# Altium PCB SmallBoard.PcbDoc
Units mm, origin at the board's own origin, x right, y up, seen from the top; angles counter-clockwise.
Board outline 52 x 52 mm, 2 copper layers (Top Layer, Bottom Layer); 27 components, 24 nets, 102 pads, 12 vias.
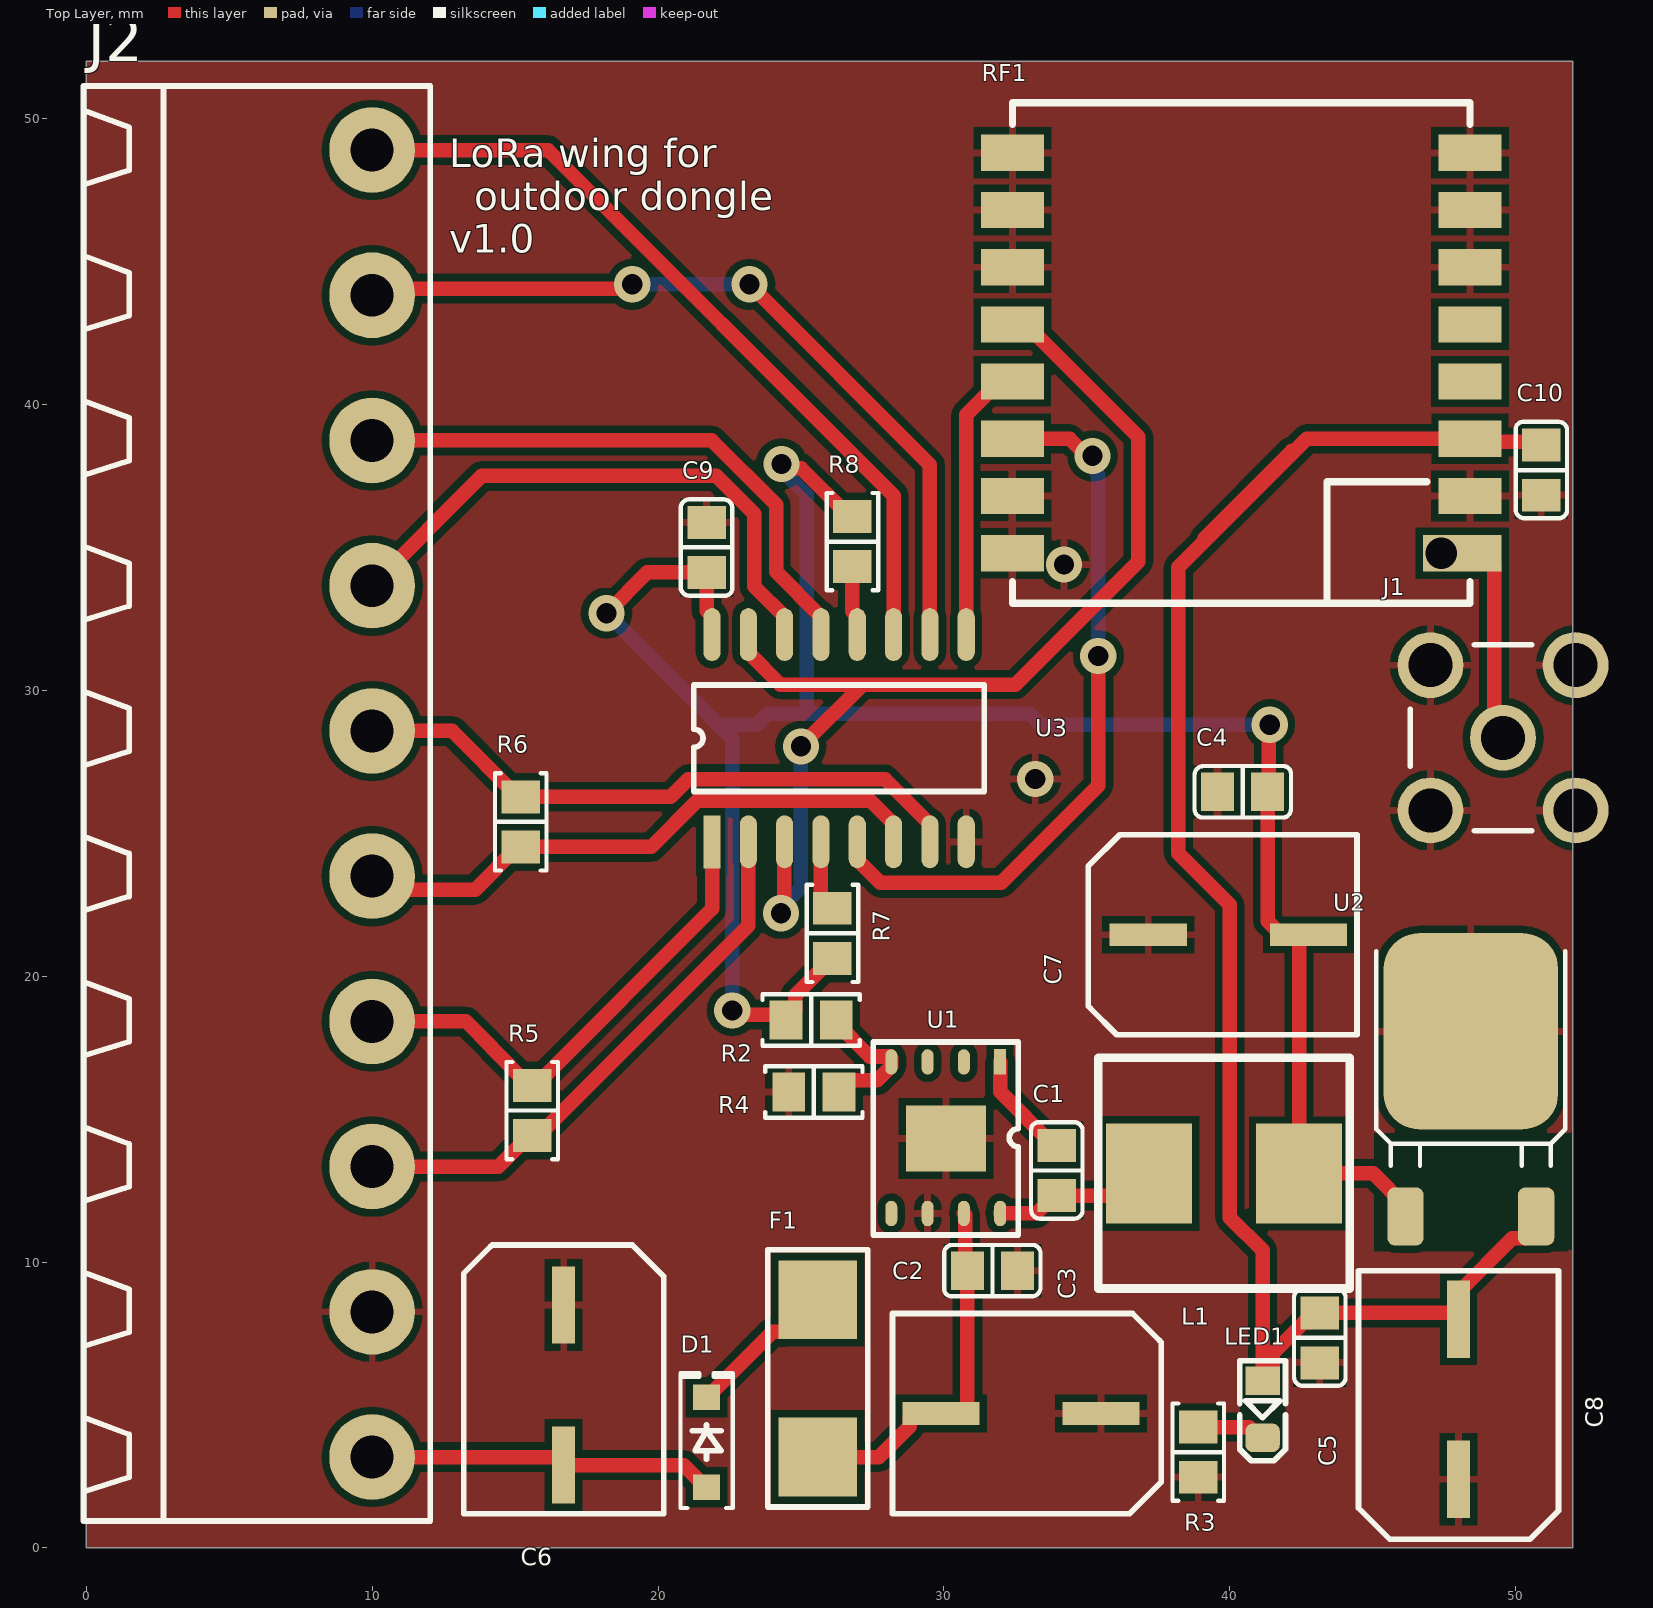
[diagram p0: Top Layer view]
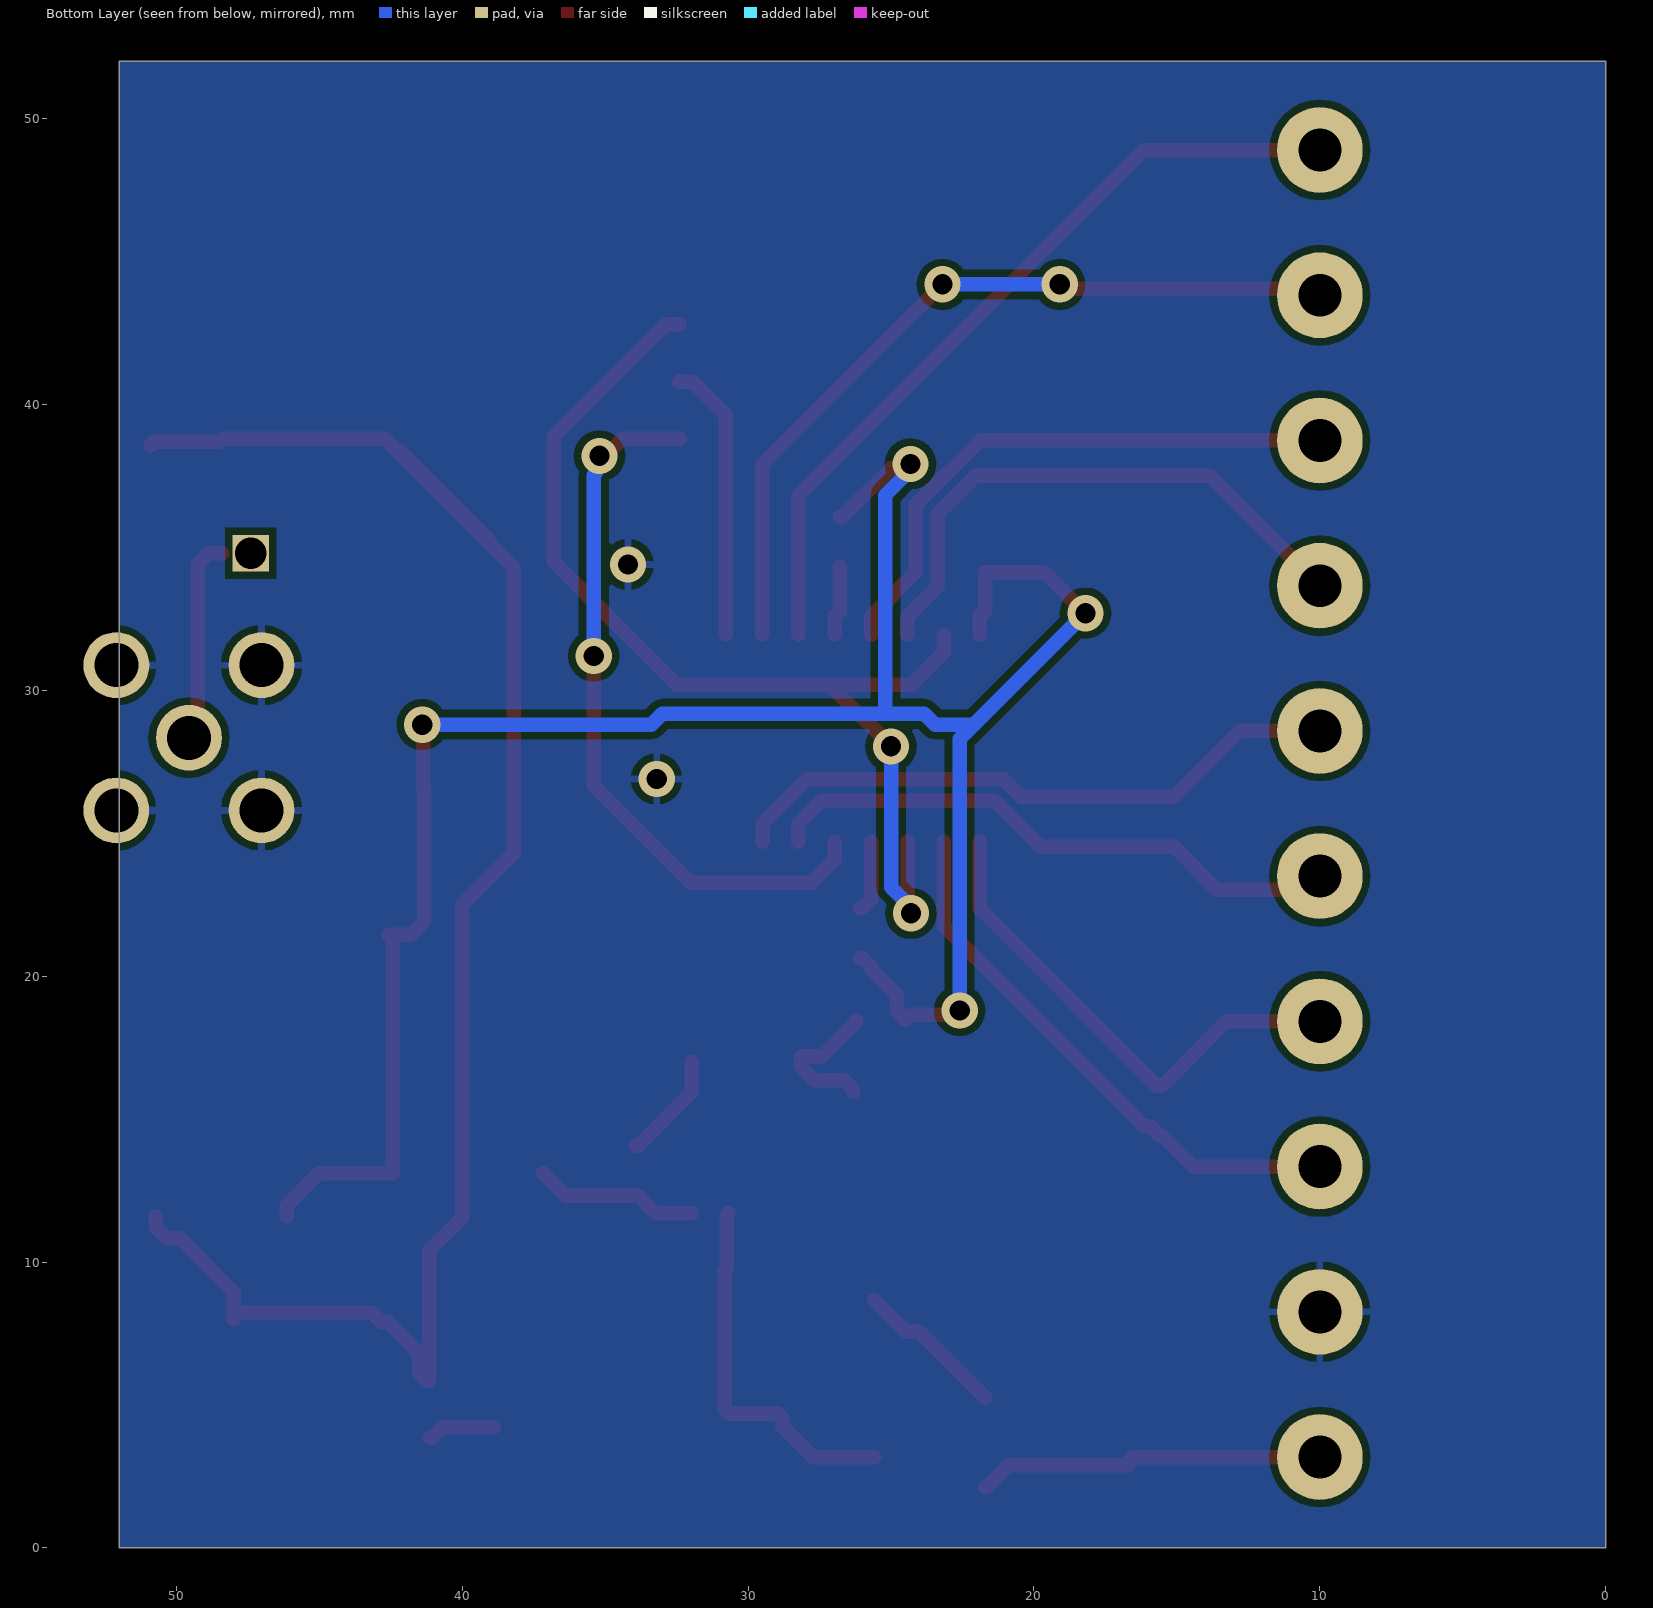
[diagram p1: Bottom Layer view, seen from below]
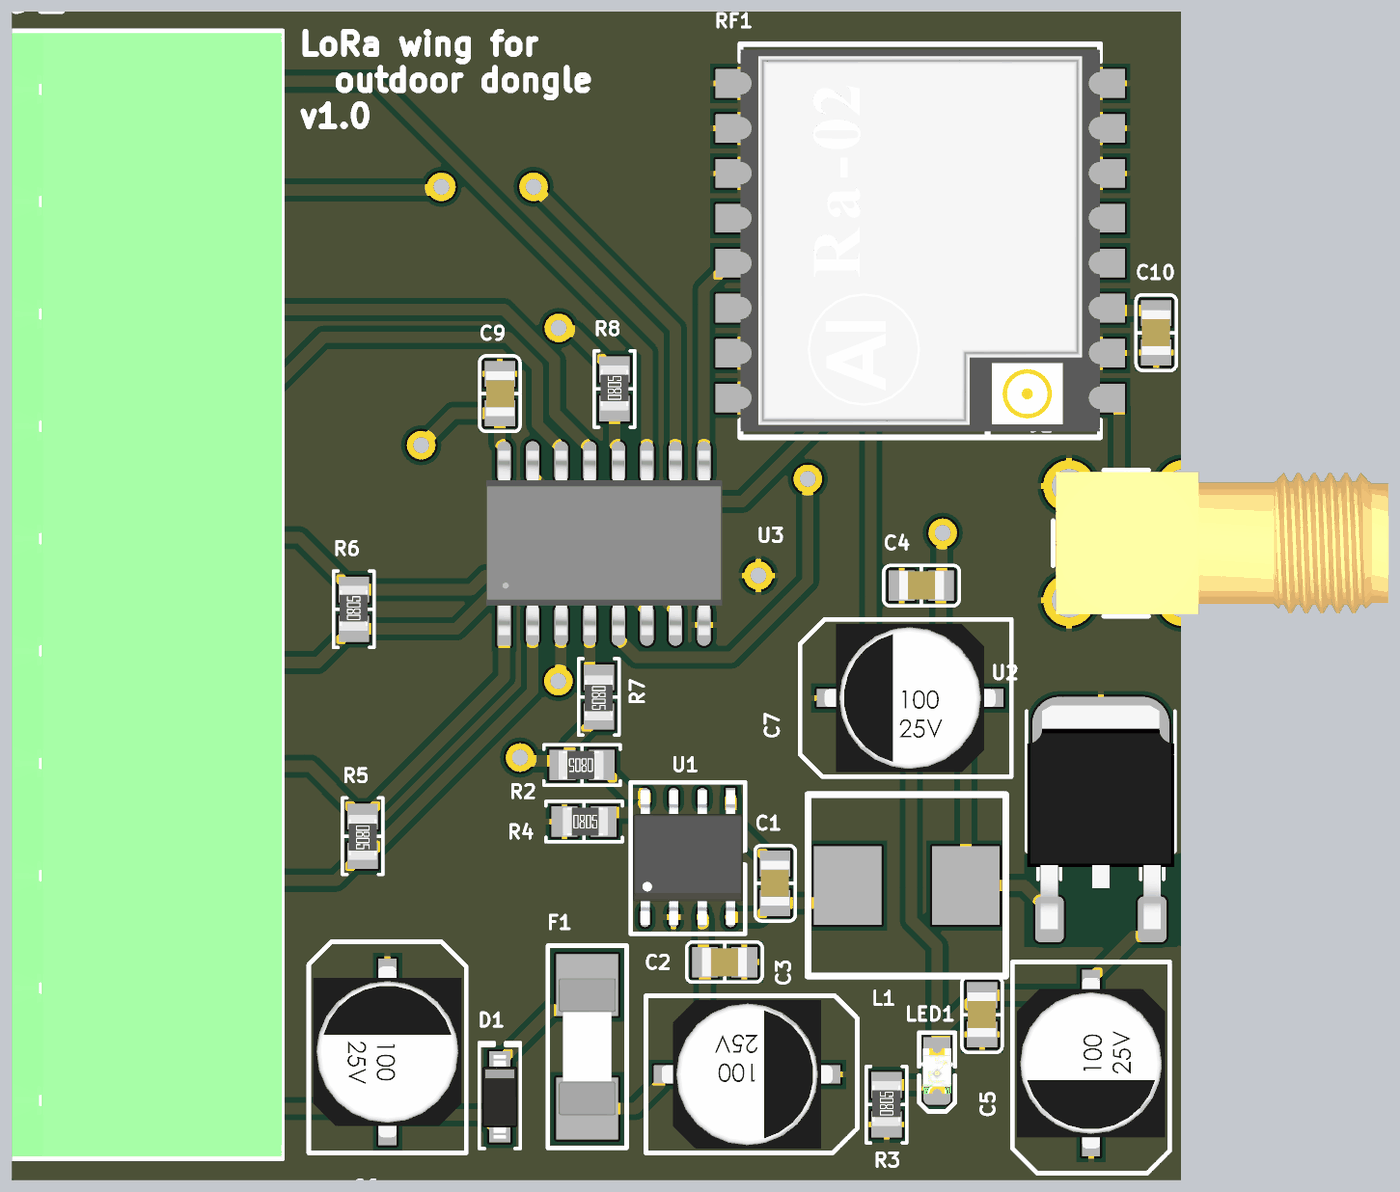
[diagram p2: 3D render of the assembled board from above, using the file's embedded part models]

## Layer stack, top to bottom
Top Solder: solder mask 0.0102, Solder Resist, Dk 3.5
Top Layer: signal copper 0.0356
Dielectric 1: dielectric 0.32, FR-4, Dk 4.8
Bottom Layer: signal copper 0.0356
Bottom Solder: solder mask 0.0102, Solder Resist, Dk 3.5

## Board outline
0,0 0,52 52,52 52,0

## Design rules (kind name [scope] priority, off if disabled: settings)
Clearance [All] p1: gap=0.254 ignorepadtopadclearanceinfootprint=FALSE except(0: Arc-Hole Track-Hole SMDPad-Hole THPad-Hole Via-Hole Fill-Hole Poly-Hole Region-Hole Text-Hole)
PolygonConnect [All] p1: connectstyle=Relief reliefconductorwidth=0.254 reliefentries=4 polygonreliefangle="90 Angle" airgapwidth=0.254
RoutingVias [All] p1: holewidth=0.711 width=1.27 viastyle="Through Hole" minholewidth=0.711 minwidth=1.27 maxholewidth=0.711 maxwidth=1.27
SilkToSilkClearance [All] p1: silktosilkclearance=0.1
SilkToSolderMaskClearance [IsPad] p1: minsilkscreentomaskgap=0 clearancetoexposedcopper=TRUE
SolderMaskExpansion [All] p1: expansion=0.102 istentingtop=FALSE
Width [All] p1: maxlimit=2 minlimit=0.254 preferedwidth=0.254
28 further rules are at their usual default settings.

## Components (designator, comment, footprint, x,y, rotation, side; value= is the part's Value field where it differs from the comment)
C1 "10nF" "CAP 0805_2012" 33.95,13.2 r90 top value=100nF
C2 "100nF" "CAP 0805_2012" 31.7,9.7 r180 top
C3 "10uF" CAP_6.3x7.7 32.7,4.7 r0 top
C4 "100nF" "CAP 0805_2012" 40.45,26.45 r0 top
C5 "100nF" "CAP 0805_2012" 43.15,7.35 r90 top
C6 "100uF" CAP_6.3x7.7 16.7,5.7 r90 top
C7 "22uF" CAP_6.3x7.7 39.95,21.45 r180 top
C8 "22uF" CAP_6.3x7.7 48,5.2 r270 top
C9 "100nF" "CAP 0805_2012" 21.7,35 r270 top
C10 "100nF" "CAP 0805_2012" 50.9,37.7 r90 top
D1 "1N5819" SOD-123 21.7,3.7 r90 top
F1 "Fuse 2402" 2402 25.7,5.7 r90 top
J1 "SMA" "MOLEX SD-73100-0114" 49.56,28.34 r0 top
J2 "Phoenix MSTB 10Pin" "PHOENIX MSTB_10" 10,26.04 r90 top
L1 "TMPC0603H Power Choke coil" 6.3coil 39.7,12.95 r0 top
LED1 "LED SMD 0805 GREEN" LED_0805_GREEN 41.15,4.85 r270 top
R2 "150k 1%" "RES 0805_2012" 25.358,18.467 r180 top value=1K
R3 "1K" "RES 0805_2012" 38.9,3.35 r90 top
R4 "47k 1%" "RES 0805_2012" 25.45,15.95 r0 top value=1K
R5 "120" "RES 0805_2012" 15.6,15.3 r270 top value=1K
R6 "120" "RES 0805_2012" 15.2,25.4 r90 top value=1K
R7 "1k" "RES 0805_2012" 26.1,21.5 r270 top value=1K
R8 "1k" "RES 0805_2012" 26.8,35.2 r90 top value=1K
RF1 "Lora-Ra-01" LORA-RA-01 48.4,33.3 r90 top
U1 "TPS5450DDAR" PDSO-G8 31.97,16.9 r270 top
U2 "LF33" TO-252 48.4,14.2 r0 top
U3 "SN65C1168NSR" SOP16 21.89,24.7 r90 top

## Footprints (in the part's own frame and the unit in brackets; to place one, negate y for a bottom-side part, rotate by r counter-clockwise, add the part's x,y. Pads: shape width x height; smd on the part's side, far side on the other; paste and mask are expansions set on the pad)
6.3coil [mm]
  rect 3x3.5 smd: 1(-2.525,0.15) 2(2.725,0.15)
  silkscreen extent -4.3,-3.88 4.5,4.2, body extent -3.77,-3.35 3.97,3.65, height 5
2402 [mm]
  rect 2.75x2.75 smd: 1(2.98,0.112) 2(-2.52,0.112)
  silkscreen extent -4.27,-1.64 4.73,1.86, body extent -2.82,-1.16 3.28,1.38, height 2.54
"CAP 0805_2012" [mm] "Chip Capacitor, 2-Leads, Body 2.00x1.20mm, IPC Medium Density"
  rect 1.15x1.35 smd: 1(-0.875,0) 2(0.875,0)
  silkscreen extent -1.68,-0.9 1.69,0.9, body extent -0.99,-0.62 1.01,0.65, height 1.26
CAP_6.3x7.7 [mm]
  rect 2.7x0.8 smd: +(-2.8,0) -(2.8,0)
  silkscreen extent -4.5,-3.5 4.9,3.5, body extent -3.8,-3.3 3.8,3.3, height 8
LED_0805_GREEN [mm] "LED SMD 0805, GREEN"
  rect 1x1.2 smd mask+0.075: 1(-1,0)
  rrect50% 1x1.2 smd mask+0.075: 2(1,0)
  Top Layer pour cut-out: -0.5,0.8 0.5,0.8 0.5,-0.8 -0.5,-0.8
  silkscreen extent -1.7,-0.8 1.8,0.8, body extent -1,-0.63 1,0.63, height 0.7
LORA-RA-01 [mm]
  rect 1.27x1.27 hole 1.1: 1(1.5,1)
  rect 1.27x2.2 smd: 1(1.5,0) 2(3.5,0) 3(5.5,0) 4(7.5,0) 5(9.5,0) 6(11.5,0) 7(13.5,0) 8(15.5,0) 9(15.5,16) 10(13.5,16) 11(11.5,16) 12(9.5,16) 13(7.5,16) 14(5.5,16) 15(3.5,16) 16(1.5,16)
  silkscreen extent -0.25,0 17.25,16, body extent 0.01,0 17.01,16, height 3.2
"MOLEX SD-73100-0114" [mm]
  round 2.302 hole 1.54: G(-2.54,-2.54) G(2.54,-2.54)
  round 2.304 hole 1.54: G(-2.54,2.54) G(2.54,2.54) S(0,0)
  silkscreen extent -3.25,-3.25 1,3.25, body extent -3.12,-3.17 11.68,3.17, height 9.67
PDSO-G8 [mm]
  rect 0.89x0.42 smd: 1(-0.1,0)
  oval 0.89x0.42 smd: 2(-0.1,-1.27) 3(-0.1,-2.54) 4(-0.1,-3.81) 5(5.2,-3.81) 6(5.2,-2.54) 7(5.2,-1.27) 8(5.2,0)
  rect 2.3x2.8 smd: 9(2.575,-1.9)
  silkscreen extent -0.8,-4.44 5.95,0.64, body extent -0.45,-4.35 5.55,0.55, height 1.7
"PHOENIX MSTB_10" [mm] "PHOENIX MSTB 2, 5-G, 5.08mm pitch"
  round 3 hole 1.5: 1(-22.86,0) 2(-17.78,0) 3(-12.7,0) 4(-7.62,0) 5(-2.54,0) 6(2.54,0) 7(7.62,0) 8(12.7,0) 9(17.78,0) 10(22.86,0)
  silkscreen extent -25.1,-2.03 25.1,10.1, body extent -25,-2 25,10, height 8.6
"RES 0805_2012" [mm] "Chip Resistor, 2-Leads, Body 2.00x1.25mm, IPC Medium Density"
  rect 1.15x1.35 smd: 1(-0.875,0) 2(0.875,0)
  silkscreen extent -1.7,-0.9 1.7,0.9, body extent -0.95,-0.62 1.05,0.63, height 0.6
SOD-123 [mm] "SOD, 2-Leads, Body 1.55x3.70mm, IPC Medium Density"
  rect 0.9x0.95 smd: 1(-1.575,0) 2(1.575,0)
  silkscreen extent -2.3,-0.92 2.41,0.92, body extent -1.86,-0.78 1.86,0.77, height 1.35
SOP16 [mm]
  rect 1.85x0.6 smd: 1(0,0)
  oval 1.85x0.6 smd: 2(0,-1.27) 3(0,-2.54) 4(0,-3.81) 5(0,-5.08) 6(0,-6.35) 7(0,-7.62) 8(0,-8.89) 9(7.25,-8.89) 10(7.25,-7.62) 11(7.25,-6.35) 12(7.25,-5.08) 13(7.25,-3.81) 14(7.25,-2.54) 15(7.25,-1.27) 16(7.25,0)
  silkscreen extent 1.76,-9.53 5.49,0.64, body extent -0.45,-9.69 7.75,0.8, height 2.01
TO-252 [mil]
  rrect40% 50x80 smd: 1(-88.75,-102.5) 3(91.25,-102.5)
  rrect40% 240x270 smd: 4(1.25,152.5)
  Top Layer pour cut-out: -132.5,12.5 137.5,12.5 137.5,-147.5 133.75,-151.25 -132.5,-151.25
  Top Layer pour cut-out: -192.5,-118.75
  silkscreen extent -129,-32 131,262, body extent -127,-119 130,272, height 91

## Part data
C1 C2 C4 C5 C9 C10: library part "Cap 0805", "SMT Capacitor"
C3 C6 C7 C8: library part "Cap Alu 6.3x7.7mm", "SMD Aluminum Capacitor 6.3x7.7mm"
D1: library part "1N5819 (SMD)", "Diode Schottky 40V 1A Surface Mount SOD-123  Speed Fast Recovery =< 500ns, > 200mA (Io)", PartNumber=1N5819HW-7-F
J1: library part "SMA-RA MOLEX SD-73100-0114 (THD)", PartNumber="MOLEX SD-73100-0114"
J2: "CONN, PHOENIX MSTB, 5-G, 5.08mm pitch", PartNumber="MSTB 2,5/10-G-5,08 - 1759091"
R2 R3 R4 R5 R6 R7 R8: library part "Res 0805", "SMT Resistor"
U1: "Buck Switching Regulator IC Positive Adjustable 1.221V 1 Output 5A 8-PowerSOIC (0.154, 3.90mm Width)", Case/Package=HSOP, Manufacturer="Texas Instruments", Max Input Voltage=36V, Max Operating Temperature=125°C, Max Output Current=5A, Max Output Voltage=31V, Min Input Voltage=5.5V, Min Operating Temperature=-40°C, Min Output Voltage=1.22V, Package Quantity=2500, Quiescent Current=3mA, Supplier Part Number 1=296-26997-1-ND, Switching Frequency=500kHz, Category="Voltage Regulators - Switching", ComponentLink1Description=https://datasheet.ciiva.com/15113/getdatasheetpartid-172659-15113657.pdf?src-supplier=Verical, ComponentLink1URL=https://datasheet.ciiva.com/15113/getdatasheetpartid-172659-15113657.pdf?src-supplier=Verical, ComponentLink2Description=https://datasheet.ciiva.com/2035/tps5450-2035367.pdf?src-supplier=Digi-Key, ComponentLink2URL=https://datasheet.ciiva.com/2035/tps5450-2035367.pdf?src-supplier=Digi-Key, ComponentLink3Description=https://datasheet.ciiva.com/2035/tps5450-2035366.pdf?src-supplier=Digi-Key, ComponentLink3URL=https://datasheet.ciiva.com/2035/tps5450-2035366.pdf?src-supplier=Digi-Key, ComponentLink4Description=https://datasheet.ciiva.com/2035/tps5450-2035368.pdf?src-supplier=Digi-Key, ComponentLink4URL=https://datasheet.ciiva.com/2035/tps5450-2035368.pdf?src-supplier=Digi-Key, ComponentLink5Description=https://datasheet.ciiva.com/14303/tps5450-14303689.pdf?src-supplier=Avnet, ComponentLink5URL=https://datasheet.ciiva.com/14303/tps5450-14303689.pdf?src-supplier=Avnet, ComponentLink6Description=https://datasheet.ciiva.com/3220/tps5450-3220230.pdf?src-supplier=Avnet, ComponentLink6URL=https://datasheet.ciiva.com/3220/tps5450-3220230.pdf?src-supplier=Avnet, Efficiency=90%, Height=1.55mm, Lead Free="Lead Free", Length=5mm, Manufacturer Part Number=TPS5450DDAR, Mount="Surface Mount", Number of Outputs=1, Number of Pins=8, Operating Supply Voltage=36V, Output Current=5A, Output Type=Adjustable, Output Voltage=31V, Packaging="Tape and Reel", Pricing 1="1=5.44000, 10=4.88400, 25=4.61720, 100=4.00170, 250=3.79648, 500=3.40658, 1000=3.09760 (USD)", Radiation Hardening=No, RoHS=Yes, RoHS Compliant=Yes, Series=SWIFT™, Stock 1=16111, Supplier 1=Digi-Key, Synchronous Rectifier=No, Weight=0.00249oz, Width=4mm
U2: library part "LF33 (SMD)", "500mA, Very Low Drop (0.45V) Voltage Regulator, 3.3V, 3-Pin DPAK, Tape and Reel", PartNumber=LF33CDT-TR, ComponentLink1Description="Manufacturer URL", ComponentLink1URL=http://www.st.com, ComponentLink2Description=Datasheet, ComponentLink2URL=http://www.st.com/internet/com/TECHNICAL_RESOURCES/TECHNICAL_LITERATURE/DATASHEET/CD00000546.pdf, DatasheetVersion=Nov-2010, PackageDescription="3-Pin Transistor Outline Package 2.28 mm Pitch, 9.7 mm Lead Span (DPAK)", PackageReference=TO-252, PackageVersion=2011
U3: "SN65C1168 Dual Differential Dri", Case/Package=SOP, Manufacturer="Texas Instruments", Max Operating Temperature=85°C, Max Supply Current=9mA, Max Supply Voltage=5.5V, Min Operating Temperature=-40°C, Min Supply Voltage=4.5V, Operating Supply Voltage=5V, Package Quantity=2000, Supplier Part Number 1=296-31716-6-ND, Category="Interface ICs", ComponentLink1Description=https://datasheet.ciiva.com/6636/sn65c1168-6636522.pdf?src-supplier=Digi-Key, ComponentLink1URL=https://datasheet.ciiva.com/6636/sn65c1168-6636522.pdf?src-supplier=Digi-Key, ComponentLink2Description=https://datasheet.ciiva.com/6636/sn65c1168-6636521.pdf?src-supplier=Digi-Key, ComponentLink2URL=https://datasheet.ciiva.com/6636/sn65c1168-6636521.pdf?src-supplier=Digi-Key, ComponentLink3Description=https://datasheet.ciiva.com/6636/sn65c1168-6636523.pdf?src-supplier=Digi-Key, ComponentLink3URL=https://datasheet.ciiva.com/6636/sn65c1168-6636523.pdf?src-supplier=Digi-Key, ComponentLink4Description=https://datasheet.ciiva.com/14426/slls159f-14426415.pdf?src-supplier=Avnet, ComponentLink4URL=https://datasheet.ciiva.com/14426/slls159f-14426415.pdf?src-supplier=Avnet, Contact Plating=Gold, Data Rate=10Mbps, ESD Protection=No, Lead Free="Lead Free", Logic Function=Transceiver,Receiver, Manufacturer Part Number=SN65C1168NSR, Nominal Supply Current=9mA, Number of Drivers=2, Number of Pins=16, Number of Receivers=2, Number of Transceivers=1, Number of Transmitters=2, Operating Supply Current=9mA, Packaging="Tape and Reel", Pricing 1="1=3.24000, 10=2.90600, 25=2.74760, 100=2.38120, 250=2.25908, 500=2.02706, 1000=1.72800 (USD)", RoHS=Yes, RoHS Compliant=Yes, Series=-, Simplex/Duplex="Full Duplex", Supplier 1=Digi-Key, Supply Current=9mA, Weight=0.007079oz

## Via types
v1: diameter 1.27, hole 0.711, Top Layer to Bottom Layer, 12 vias

## Nets (pads, with @x,y where several pads share a name; then routed paths per layer and width w, separated by ;. In a path a pad name is that pad's centre, name@x,y a point inside that pad or via, vN(x,y) a via of type N, cw(c..) or ccw(c..) an arc to the next point about the centre after c; other vN are vias at no path point)
1A: J2.7 U3.14 | length 20.2
  Top Layer w0.508: J2.7 13.84,37.5 22.043,37.5 23.372,36.172 23.372,33.633 24.43,32.575 U3.14
1B: J2.8 U3.13 | length 20.3
  Top Layer w0.508: J2.8 21.881,38.74 24.134,36.487 24.134,34.141 25.7,32.575 U3.13
1DE: R7.1 U3.4 | length 2.5
  Top Layer w0.508: U3.4 25.7,22.696 26.021,22.375 R7.1
1Y: J2.3 R5.2 U3.2 | length 19.6
  Top Layer w0.508: J2.3 14.415,13.34 15.5,14.425 R5.2 15.921,14.746 16.139,14.746 23.16,21.767 U3.2
1Z: J2.4 R5.1 U3.1 | length 17.7
  Top Layer w0.508: J2.4 13.282,18.42 14.2,17.502 14.2,17.475 15.5,16.175 R5.1 15.7,16.175 21.89,22.365 U3.1
2A: J2.9 U3.10 | length 28.2
  Top Layer w0.508: J2.9 10.234,44.054 18.954,44.054 v1(19.1,44.2) ; v1(23.2,44.2) 29.51,37.89 U3.10
  Bottom Layer w0.508: v1(19.1,44.2) v1(23.2,44.2)
2B: J2.10 U3.11 | length 28.1
  Top Layer w0.508: J2.10 16.152,48.9 28.24,36.812 U3.11
2DE: R8.1 U3.12 | length 2.4
  Top Layer w0.508: R8.1 26.8,32.77 26.97,32.6 U3.12
2Y: J2.5 R6.1 U3.6 | length 20.7
  Top Layer w0.508: J2.5 10.475,23.025 13.6,23.025 15.1,24.525 R6.1 19.772,24.525 21.38,26.133 27.432,26.133 28.24,25.325 U3.6
2Z: J2.6 R6.2 U3.7 | length 22
  Top Layer w0.508: J2.6 12.795,28.58 15.1,26.275 20.444,26.275 21.064,26.895 27.94,26.895 29.48,25.355 29.48,24.73 U3.7
3V3: C5.2 C8.+ C10.2 LED1.1 RF1.3 U2.3 | length 62
  Top Layer w0.508: 39.1,35.3 42.173,38.373 ; C8.+ C8.+@48,8.079 ; U2.3 50.718,11.215 50.337,10.834 49.884,10.834 48,8.95 C8.+@48,8.079 ; C10.2 50.788,38.687 48.512,38.687 RF1.3 42.7,38.8 38.2,34.3 38.2,24.3 40,22.5 40,11.557 41.15,10.407 LED1.1 41.25,5.85 41.496,6.096 41.496,6.789 42.611,7.904 42.829,7.904 C5.2 47.854,8.225 C8.+@48,8.079
+5: C4.2 C7.+ C9.2 L1.2 R2.2 R7.2 R8.2 U2.1 U3.16 | length 80.3
  Top Layer w0.508: v1(18.2,32.7) 19.625,34.125 C9.2 21.7,32.79 21.89,32.6 U3.16 ; v1(22.6,18.8) 22.746,18.654 24.296,18.654 R2.2 24.804,18.788 24.804,19.329 25.679,20.204 25.679,20.304 26,20.625 R7.2 ; v1(24.319,37.919) 24.465,37.773 25.002,37.773 26.7,36.075 R8.2 ; v1(41.4,28.8) 41.362,28.762 41.362,26.488 C4.2 41.325,21.925 41.8,21.45 42.571,21.45 42.425,21.304 L1.2 45.023,13.1 46.146,11.977 U2.1
  Bottom Layer w0.508: v1(18.2,32.7) 22.1,28.8 ; v1(22.6,18.8) 22.6,28.3 22.1,28.8 ; v1(24.319,37.919) 24.319,37.713 25.2,36.831 25.2,29.181 ; v1(41.4,28.8) 33.387,28.8 33.006,29.181 25.2,29.181 ; 22.1,28.8 23.46,28.8 23.841,29.181 25.2,29.181
+12: C2.2 C3.+ F1.2 U1.7 | length 13
  Top Layer w0.508: F1.2 27.725,3.18 28.804,4.259 28.804,4.554 28.95,4.7 C3.+ 30.679,4.7 30.825,4.846 C2.2 30.744,9.781 30.744,11.656 U1.7
+12_AFTER: C6.+ D1.1 J2.1 | length 12.2
  Top Layer w0.508: J2.1 16.554,3.18 16.7,3.034 C6.+ 20.9,2.9 21.675,2.125 D1.1
GND: C2.1 C3.- C4.1 C5.1 C6.- C7.- C8.- C9.1 C10.1 J1.G J2.2 R3.1 R4.1 RF1.2 RF1.6 RF1.7 RF1.8 RF1.9 RF1.10 RF1.11 RF1.15 RF1.16 U1.6 U1.9 U2.4 U3.8
  other v1: 33.2,26.9 34.2,34.4
NetC1_1: C1.1 L1.1 U1.8 | length 5.8
  Top Layer w0.508: U1.8 33.225,11.7 33.85,12.325 C1.1 36.4,12.325 L1.1
NetC1_2: C1.2 U1.1 | length 3.8
  Top Layer w0.508: U1.1 31.97,15.955 33.85,14.075 C1.2
NetD1_2: D1.2 F1.1 | length 5.3
  Top Layer w0.508: D1.2 21.725,5.275 24.009,7.559 24.467,7.559 F1.1
NetJ1_S: J1.S RF1.1 | length 7.2
  Top Layer w0.508: RF1.1@48.4,34.8 48.865,34.8 49.246,34.419 49.246,28.654 J1.S
NetLED1_2: LED1.2 R3.2 | length 2.4
  Top Layer w0.508: R3.2 40.675,4.225 41.05,3.85 LED1.2
NetR2_1: R2.1 R4.2 U1.4 | length 5.1
  Top Layer w0.508: R2.1 26.233,18.367 27.409,17.191 28.116,17.191 28.16,17.147 U1.4 28.16,16.853 27.662,16.355 26.646,16.355 26.325,16.034 R4.2
SPI1_MISO: RF1.13 U3.9 | length 9.8
  Top Layer w0.508: U3.9 30.78,39.645 31.935,40.8 RF1.13
SPI1_MOSI: RF1.14 U3.5 | length 25.5
  Top Layer w0.508: U3.5 26.97,24.075 27.778,23.267 32,23.267 35.4,26.667 v1(35.4,31.2) ; RF1.14 34.394,38.8 34.994,38.2 v1(35.2,38.2)
  Bottom Layer w0.508: v1(35.2,38.2) 35.346,38.054 35.346,37.576 35.4,37.521 v1(35.4,31.2)
SPI1_SCK: RF1.12 U3.3 U3.15 | length 38.6
  Top Layer w0.508: U3.15 23.16,31.325 24.285,30.2 27.162,30.2 ; v1(24.303,22.2) 24.412,22.309 24.412,24.682 U3.3 ; v1(25,28.038) 27.162,30.2 ; RF1.12 32.865,42.8 36.8,38.865 36.8,34.5 32.5,30.2 27.162,30.2
  Bottom Layer w0.508: v1(24.303,22.2) 24.303,22.406 25,23.103 v1(25,28.038)
pads on no net: RF1.4 RF1.5 U1.2 U1.3 U1.5

## Polygon pours and split planes (outlines as drawn)
GND on Top Layer "GND_L01_P002" (solid, pour order 2): 0,0.1 0,0.009 0,52 52,52 52,0 0.1,0
no net on Top Layer "NONET_L01_P000" (solid, pour order 0): 0,0.1
GND on Bottom Layer "GND_L02_P003" (solid, pour order 3): 0,52 52,52 52,0 0,0

## Silkscreen, mask and mechanical layers (free items; w line width, h text height)
Top Overlay:
  text "LoRa wing for /   outdoor dongle / v1.0" at 12.7,45.3 h1